# Altium PCB PCB2.PcbDoc
Units mm, origin at the board's own origin, x right, y up, seen from the top; angles counter-clockwise.
Board outline 106 x 106 mm, 2 copper layers (Top Layer, Bottom Layer); 24 components, 36 nets, 168 pads, 5 vias.
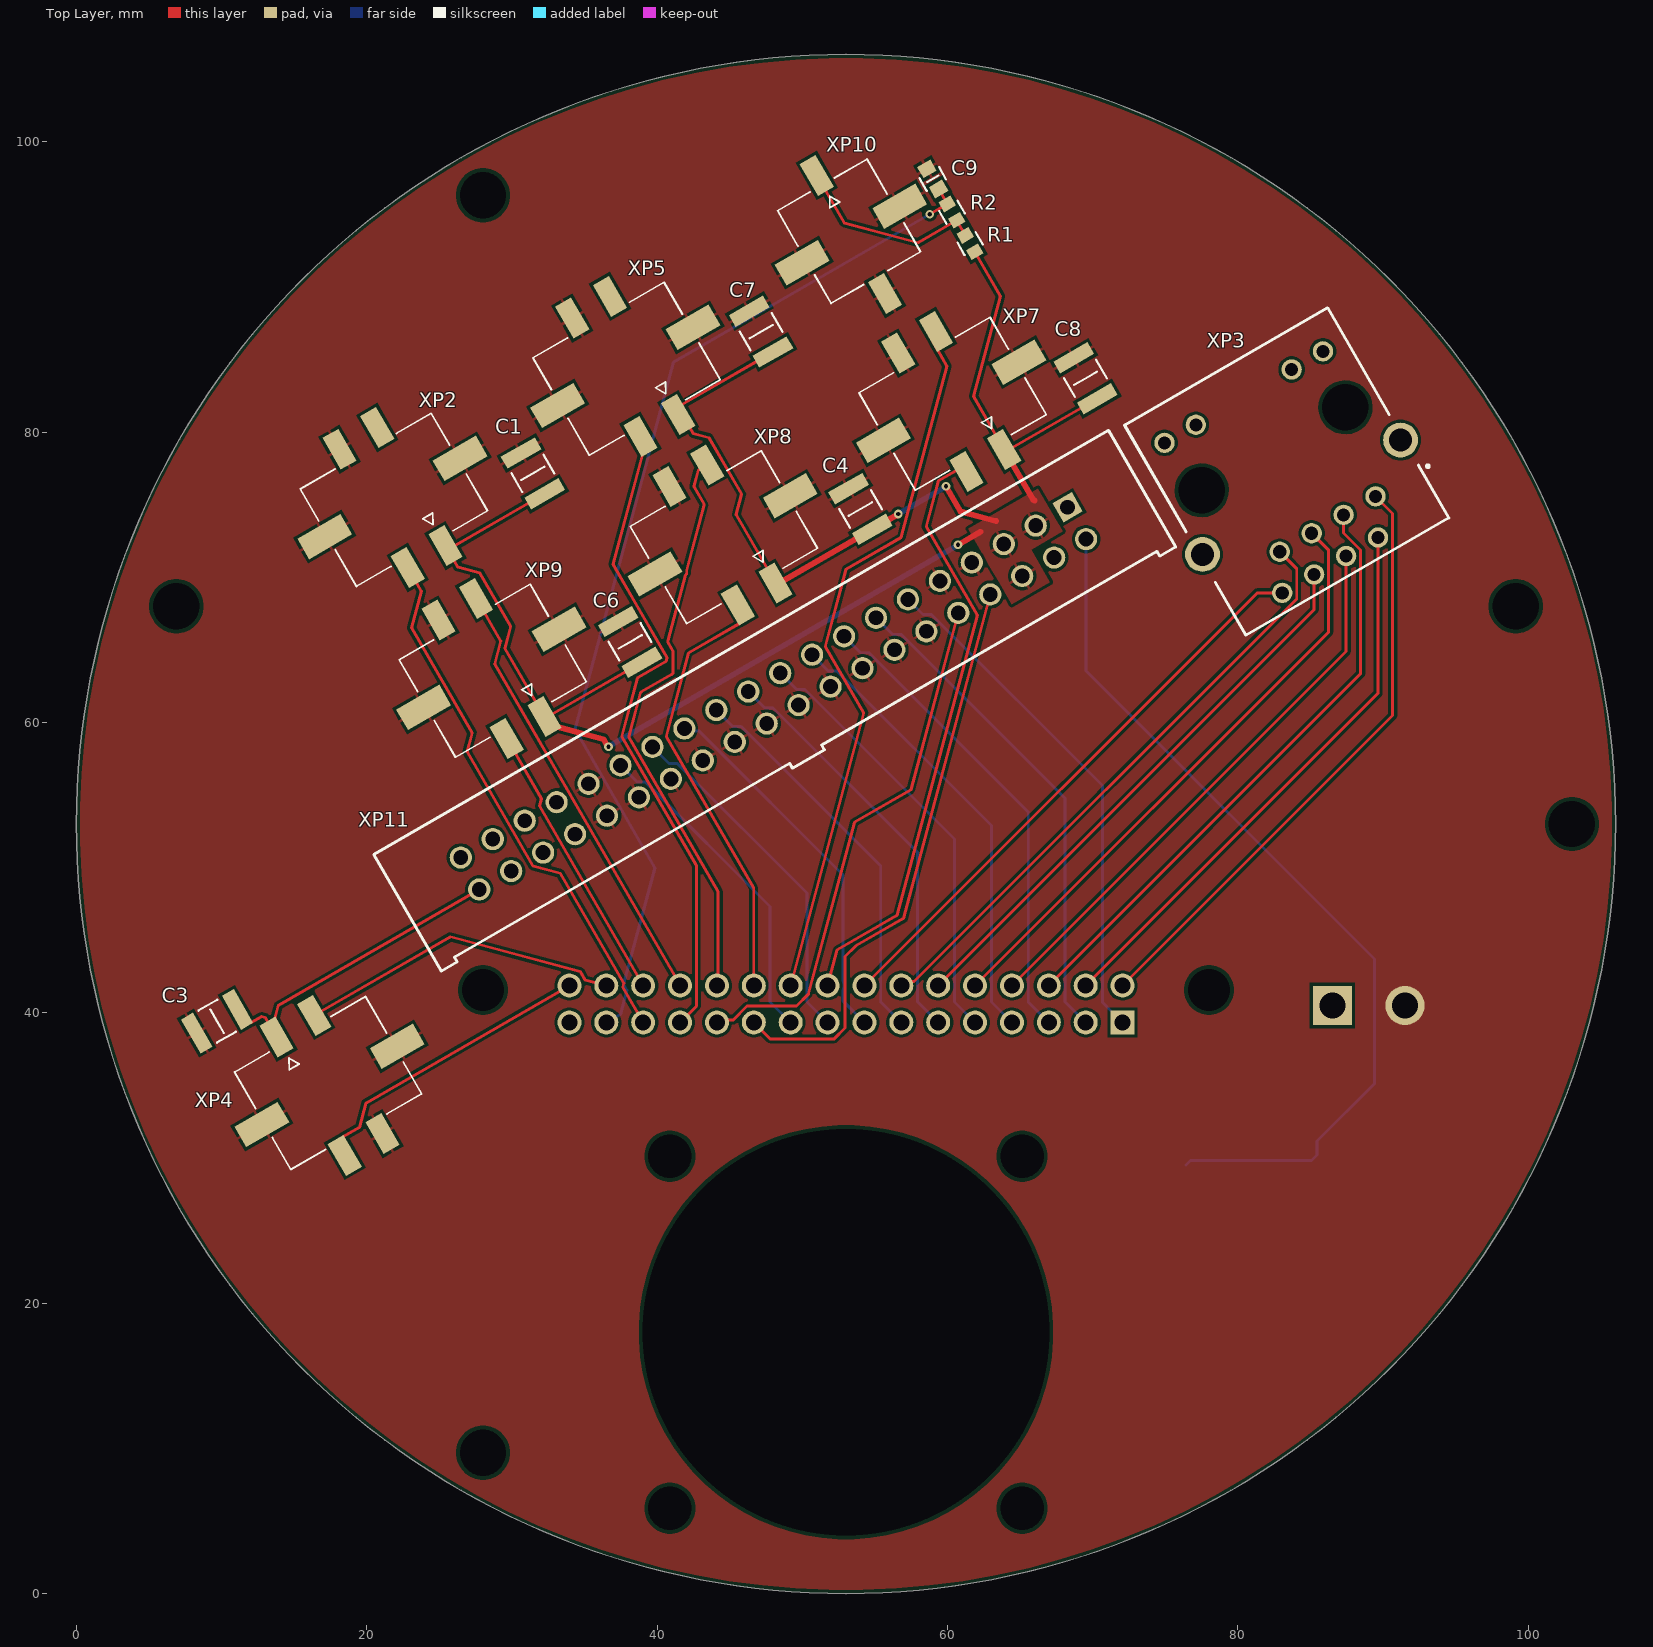
[diagram p0: Top Layer view]
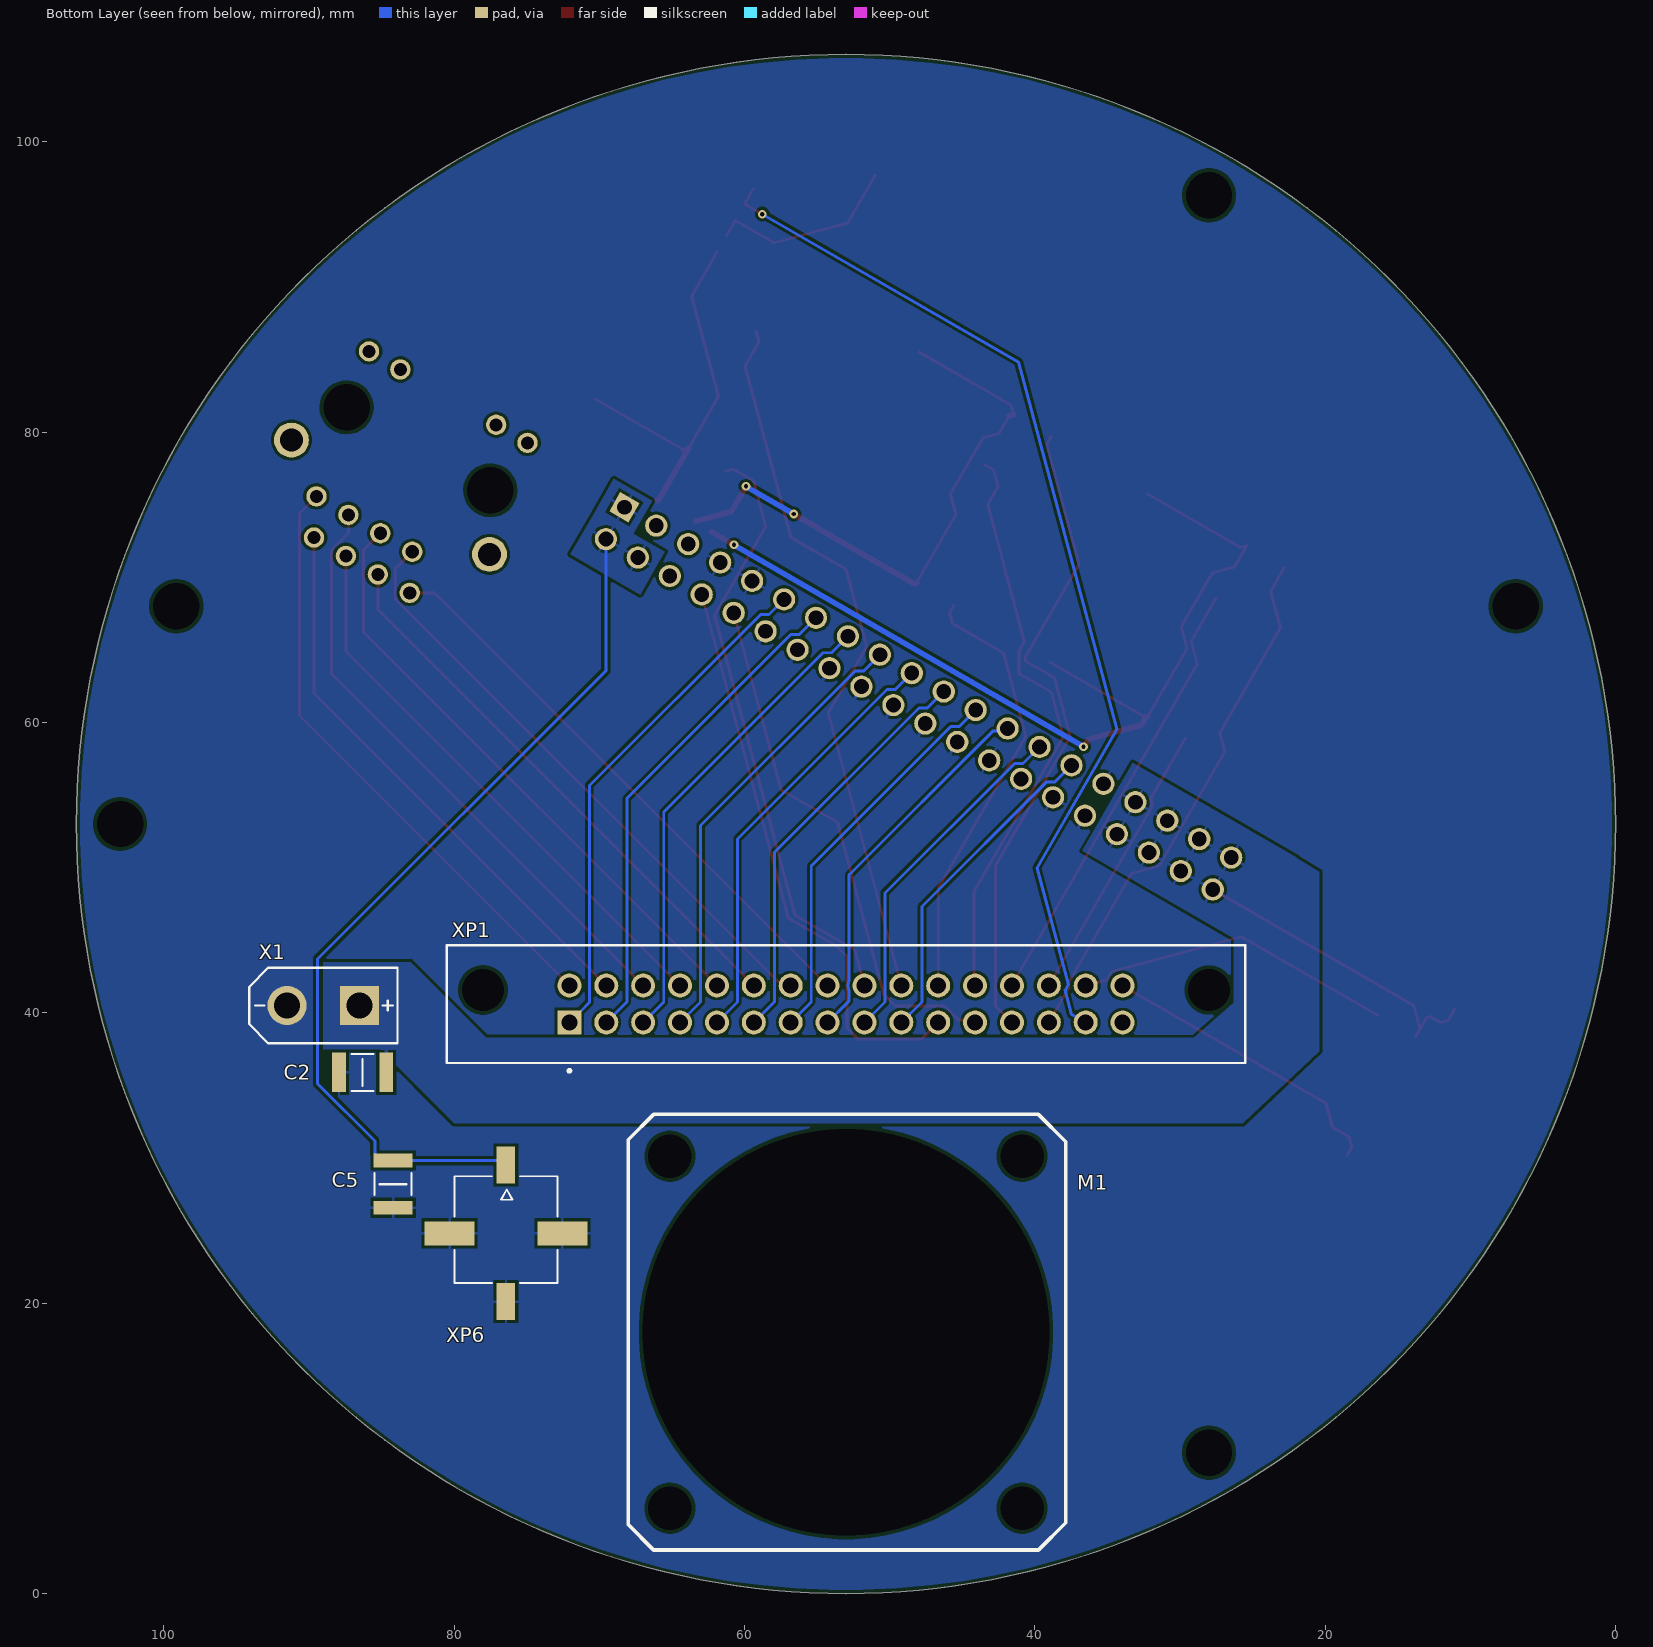
[diagram p1: Bottom Layer view, seen from below]
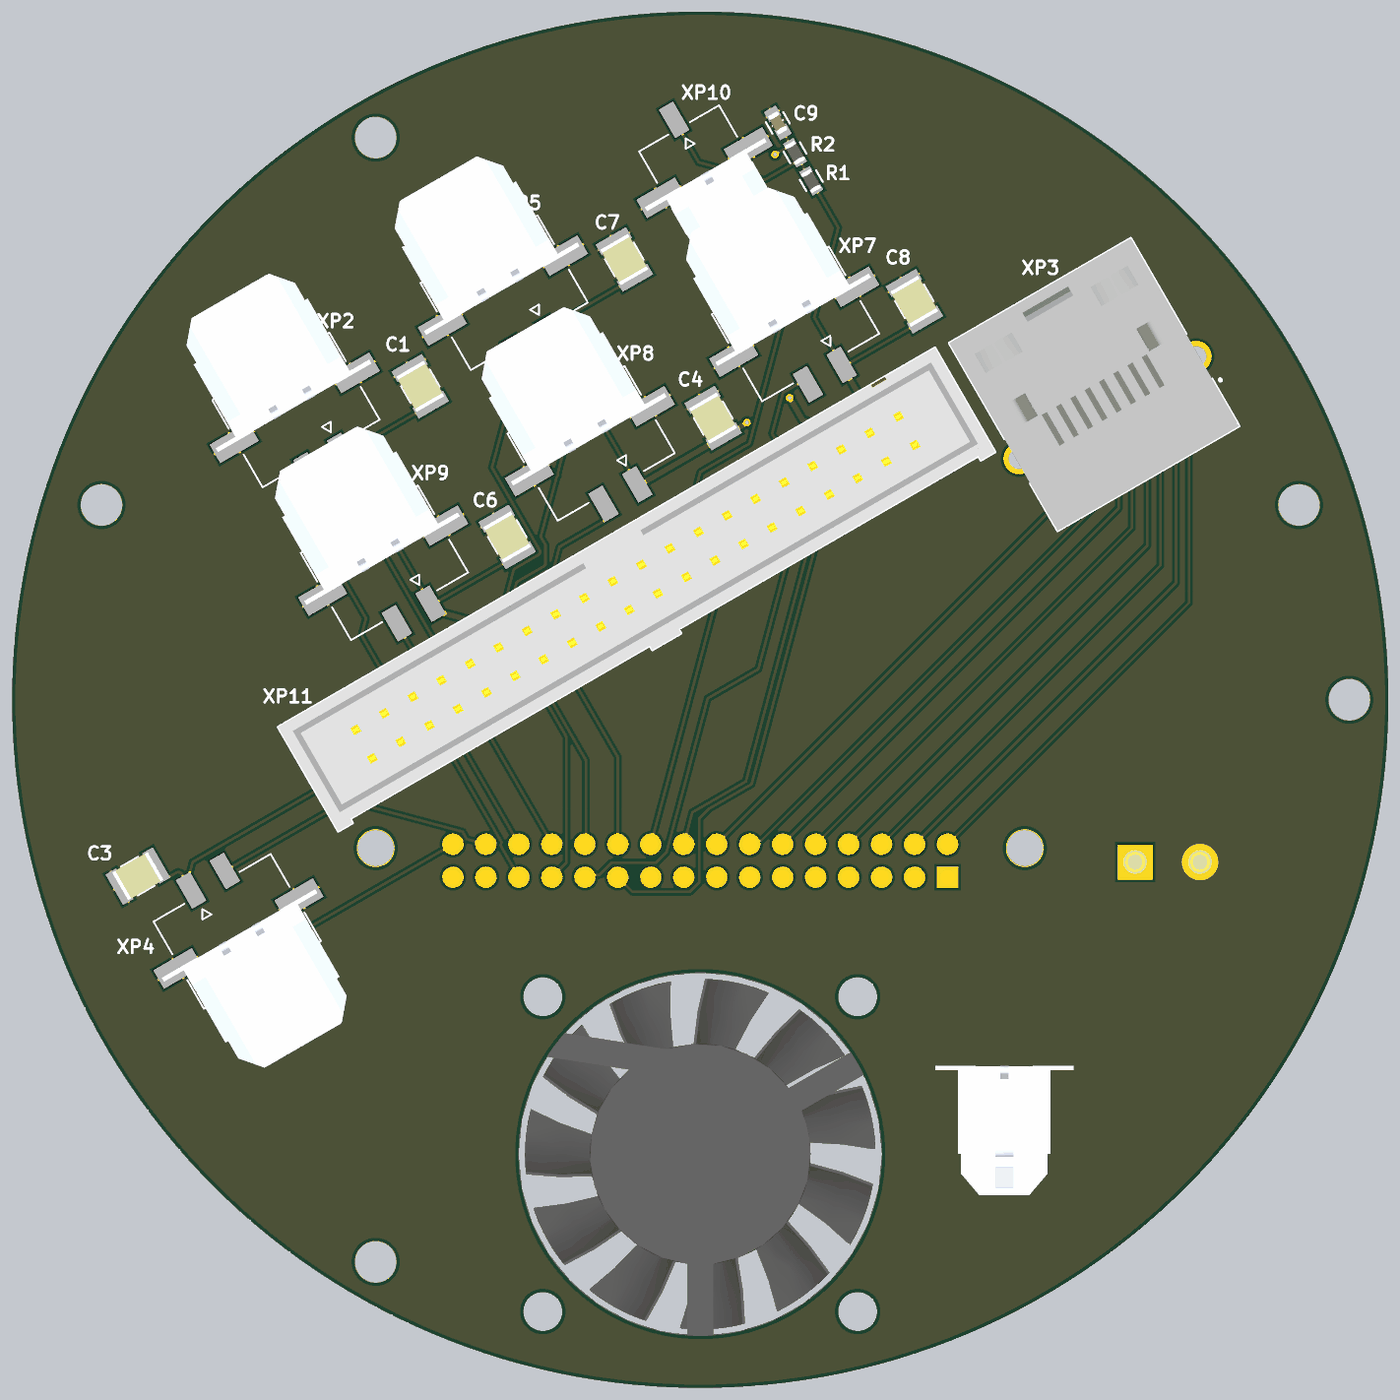
[diagram p2: 3D render of the assembled board from above, using the file's embedded part models]
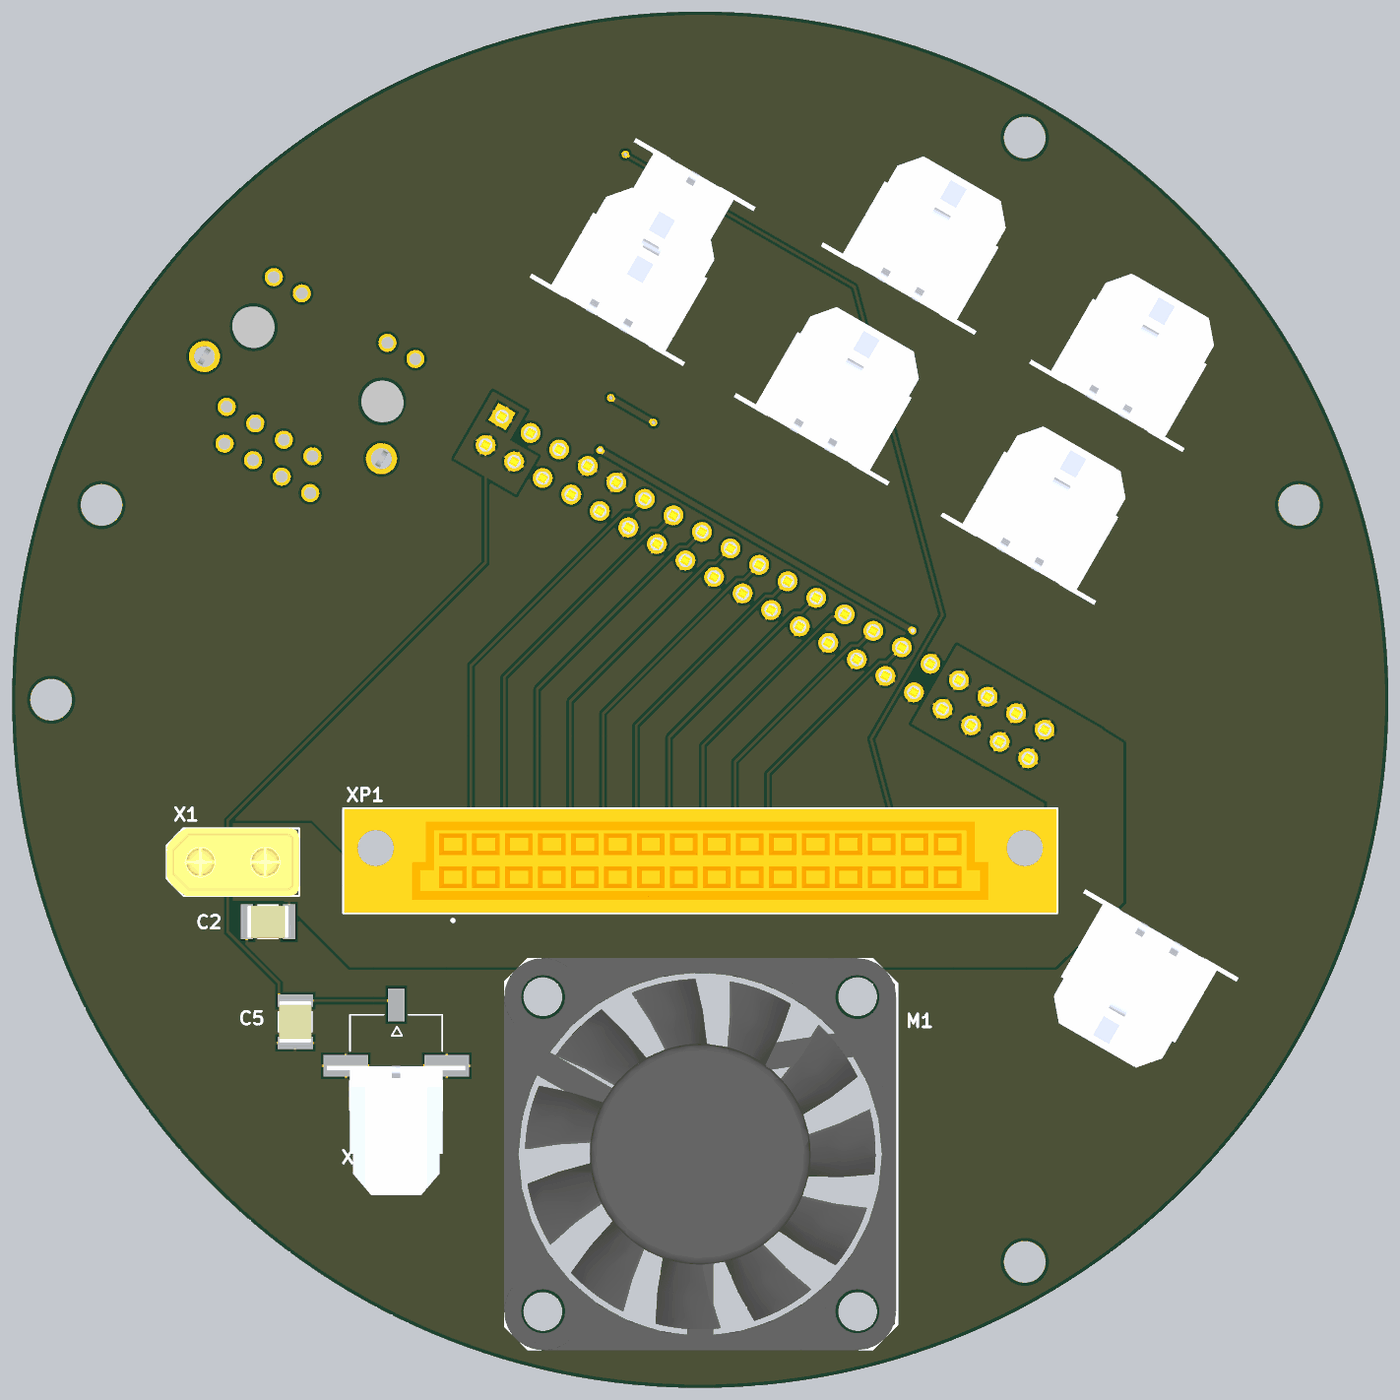
[diagram p3: 3D render of the assembled board from below, using the file's embedded part models]

## Layer stack, top to bottom
Top Solder: solder mask 0.0102, Solder Resist, Dk 3.5
Top Layer: signal copper 0.0356
Dielectric 1: dielectric 0.32, FR-4, Dk 4.8
Bottom Layer: signal copper 0.0356
Bottom Solder: solder mask 0.0102, Solder Resist, Dk 3.5

## Board outline
53.006,0.006 cw(c53.006,53.006) 0.006,53.006 cw(c53.006,53.006) 53.006,106.006 cw(c53.006,53.006) 106.006,53.006 cw(c53.006,53.006)

## Design rules (kind name [scope] priority, off if disabled: settings)
AcuteAngle [All] p1: minimum=3.50000000000000E+0001 checktracksonly=FALSE
BoardOutlineClearance "BoardOutlineClearance 1" [All] p1: gap=0.25 ignorepadtopadclearanceinfootprint=FALSE except(0: Arc-SplitContinuation Track-SplitContinuation SMDPad-SplitContinuation THPad-SplitContinuation Via-SplitContinuation Fill-SplitContinuation Poly-SplitContinuation Region-SplitContinuation Text-SplitContinuation) // Milling
BoardOutlineClearance "BoardOutlineClearance 2" [All] p2: gap=0.4 ignorepadtopadclearanceinfootprint=FALSE except(0: Arc-SplitContinuation Track-SplitContinuation SMDPad-SplitContinuation THPad-SplitContinuation Via-SplitContinuation Fill-SplitContinuation Poly-SplitContinuation Region-SplitContinuation Text-SplitContinuation) // V-Cut
Clearance "Clearance-1 1 Oz" [All] p1: gap=0.2 ignorepadtopadclearanceinfootprint=FALSE except(0.25: Arc-Hole Track-Hole SMDPad-Hole THPad-Hole Via-Hole Fill-Hole Poly-Hole Region-Hole Text-Hole) // Standart
DiffPairsRouting "DiffPairsRouting 1 Oz" [All] p1: maxlimit=0.254 minlimit=0.2 mostfreqgap=0.254 toplayer_minwidth=0.2 toplayer_maxwidth=0.381 toplayer_prefwidth=0.361 bottomlayer_minwidth=0.2 bottomlayer_maxwidth=0.381 bottomlayer_prefwidth=0.361 maxuncoupledlength=12.7
HoleSize "Minimum HoleSize" [IsPad] p1: absolutevalues=TRUE maxlimit=5.9 minlimit=0.6 maxpercent=80.000 minpercent=20.000
HoleSize "Minimum HoleSize VIA 1" [IsVia] p2: absolutevalues=TRUE maxlimit=5.9 minlimit=0.3 maxpercent=80.000 minpercent=20.000 // Standart
HoleToHoleClearance Hole2HoleClearance [All] p1: gap=0.25 allowstackedmicrovias=FALSE
MinimumAnnularRing "Minimum AR VIA Standart" [IsVia] p1: minimumring=0.15
MinimumAnnularRing "Minimum AR PAD Standart" [IsPAD] p2: minimumring=0.2
MinimumSolderMaskSliver "SolderMask Bridge Standart" [All] p1: minsoldermaskwidth=0.15 // All Masks
PlaneClearance "PlaneClearance 1 Oz" [All] p1: clearance=0.2
PlaneConnect "TermalConnect-1 1 Oz" [All] p1: planeconnectstyle=Relief reliefexpansion=0.2 reliefentries=4 reliefconductorwidth=0.2 reliefairgap=0.2 // Standart
PolygonConnect X1 [Component = 'X1'] p1: connectstyle=Direct reliefconductorwidth=0.254 reliefentries=4 polygonreliefangle="90 Angle" airgapwidth=0.254
PolygonConnect "PolygonConnect-1 1 Oz" [All] p2: connectstyle=Relief reliefconductorwidth=0.2 reliefentries=4 polygonreliefangle="90 Angle" airgapwidth=0.2 // Standart
RoutingCorners [All] p1 off: cornerstyle=45-Degree minsetback=2.54 maxsetback=2.54
RoutingVias [All] p1: holewidth=0.3 width=0.6 viastyle="Through Hole" minholewidth=0.2 minwidth=0.4 maxholewidth=5.9 maxwidth=6.4
SilkToSilkClearance Silk2SilkClearance [All] p1 off: silktosilkclearance=0.15
SilkToSolderMaskClearance Silk2SolderMaskClearance [IsPad] p1 off: minsilkscreentomaskgap=0.15 clearancetoexposedcopper=TRUE
SolderMaskExpansion SolderMaskExpansion-1 [All] p1: expansion=0.05 istentingtop=FALSE // Standart
SolderMaskExpansion "SolderMaskExpansion LDI" [All] p2: expansion=0.025 istentingtop=FALSE // Advance
SupplyNets "Schematic Supply Nets_3" [InNet('+5')] p1: voltage=0.000
SupplyNets "Schematic Supply Nets_2" [InNet('+24')] p2: voltage=0.000
SupplyNets "Schematic Supply Nets_1" [InNet('GND')] p3: voltage=0.000
SupplyNets "Schematic Supply Nets" [InNet('+12')] p4: voltage=0.000
UnRoutedNet [All] p1: checkbadconnections=TRUE
Width "Width 1 Oz" [All] p1: maxlimit=10 minlimit=0.15 preferedwidth=0.2 checkconnectedcopper=TRUE
20 further rules are at their usual default settings.

## Classes and differential pairs
differential pair RS485: +RS485_P -RS485_N
differential pair "ethernet 4": +"ethernet 4_P" -"ethernet 4_N"
differential pair "ethernet 3": +"ethernet 3_P" -"ethernet 3_N"
differential pair "ethernet 2": +"ethernet 2_P" -"ethernet 2_N"
differential pair "ethernet 1": +"ethernet 1_P" -"ethernet 1_N"

## Components (designator, comment, footprint, x,y, rotation, side; value= is the part's Value field where it differs from the comment)
C1 "Capacitor" 1210C 31.438,77.151 r300 top value="22 мк"
C2 "Capacitor" 1210C 86.3,35.9 r180 bottom value="22 мк"
C3 "Capacitor" 1210C 9.689,39.421 r30 top value="22 мк"
C4 "Capacitor" 1210C 54,74.7 r300 top value="22 мк"
C5 "Capacitor" 1210C 84.2,28.2 r90 bottom value="22 мк"
C6 "Capacitor" 1210C 38.138,65.546 r300 top value="22 мк"
C7 "Capacitor" 1210C 47.16,86.92 r300 top value="22 мк"
C8 "Capacitor" 1210C 69.5,83.7 r300 top value="22 мк"
C9 "Capacitor" 0603C 58.983,97.442 r300 top value="0,1 мк"
M1 "cooler3030" cooler3030 53.006,18.006 r180 bottom locked
R1 "Resistor" 0603R 61.558,92.982 r120 top value="1,0 к"
R2 "Resistor" 0603R 60.308,95.147 r120 top value="1,0 к"
X1 "XT30UPB-M" XT30UPB-M 89.006,40.506 r0 bottom locked
XP1 "DIN41612_32_2row_straight_mother" DIN41612_32_2row_straight_mother 53.006,40.606 r0 bottom locked
XP2 "430450418" MOLEX_430450418 21.771,75.495 r30 top
XP3 "1734577-3" 1-1734577-3-rj45-8p8c 89.479,75.569 r30 top
XP4 "430450418" MOLEX_430450418 17.436,35.003 r210 top
XP5 "430450418" MOLEX_430450418 37.806,84.522 r30 top
XP6 "430450218" Molex_430450218 76.425,24.811 r0 bottom
XP7 "430450418" MOLEX_430450418 60.251,82.12 r30 top
XP8 "430450418" MOLEX_430450418 44.506,72.917 r30 top
XP9 "430450418" MOLEX_430450418 28.584,63.725 r30 top
XP10 "430450218" Molex_430450218 53.344,93.609 r210 top
XP11 "IDC_40_Male conector" "IDC_40_Male conector" 48.009,61.661 r210 top locked

## Footprints (in the part's own frame and the unit in brackets; to place one, negate y for a bottom-side part, rotate by r counter-clockwise, add the part's x,y. Pads: shape width x height; smd on the part's side, far side on the other; paste and mask are expansions set on the pad)
1-1734577-3-rj45-8p8c [mm]
  round 1.4 hole 0.9: 1(0,0) 2(-1.27,-2.54) 3(-2.54,0) 4(-3.81,-2.54) 5(-5.08,0) 6(-6.35,-2.54) 7(-7.62,0) 8(-8.89,-2.54) 9(-10.745,10.46) 10(-8.255,10.46) 11(-0.635,10.46) 12(1.855,10.46)
  round 2.4 hole 1.6: MH1(3.43,2.5) MH2(-12.32,2.5)
  round 0 hole 3.2 unplated: MH3(1.27,6.35) MH4(-10.16,6.35)
  silkscreen extent -12.52,-3.8 4.25,12.9, body extent -12.52,-3.8 3.63,12.9, height 16.55
0603C [mm] "Chip Resistor, 2-Leads, Body 1,40x0,80mm, IPC Medium Density"
  rect 0.9x1.05 smd: 1(-0.8,0) 2(0.8,0)
  silkscreen extent -0.5,-0.77 0.5,0.78, body extent -0.85,-0.45 0.85,0.45, height 0.9
0603R [mm] "Chip Resistor, 2-Leads, Body 1.60x0.85mm, IPC Medium Density"
  rect 0.8x0.95 smd: 1(-0.65,0) 2(0.65,0)
  silkscreen extent -0.5,-0.73 0.5,0.73, body extent -0.87,-0.47 0.88,0.48, height 0.9
1210C [mm]
  rect 0.954x2.706 smd paste+0: 1(-1.625,0) 2(1.625,0)
  silkscreen extent -0.75,-1.28 0.75,1.27, body extent -2.35,-1.6 2.35,1.6, height 0.25
cooler3030 [mm]
  round 1.4 hole 3 unplated: 0(-12.125,12.125) 0(-12.125,-12.125) 0(12.125,12.125) 0(12.125,-12.125)
  round 0 hole 28 unplated: 0(0,0)
  silkscreen extent -15,-15 15.13,15, body extent -15.1,-15.1 15.1,15.1, height 6.6
DIN41612_32_2row_straight_mother [mm]
  rect 1.65x1.65 / inner round 1.65 / far side rect 1.65x1.65 hole 1.1: A1(19.05,1.27)
  round 1.65 hole 1.1: A2(16.51,1.27) A3(13.97,1.27) A4(11.43,1.27) A5(8.89,1.27) A6(6.35,1.27) A7(3.81,1.27) A8(1.27,1.27) A9(-1.27,1.27) A10(-3.81,1.27) A11(-6.35,1.27) A12(-8.89,1.27) A13(-11.43,1.27) A14(-13.97,1.27) A15(-16.51,1.27) A16(-19.05,1.27) B1(19.05,-1.27) B2(16.51,-1.27) B3(13.97,-1.27) B4(11.43,-1.27) B5(8.89,-1.27) B6(6.35,-1.27) B7(3.81,-1.27) B8(1.27,-1.27) B9(-1.27,-1.27) B10(-3.81,-1.27) B11(-6.35,-1.27) B12(-8.89,-1.27) B13(-11.43,-1.27) B14(-13.97,-1.27) B15(-16.51,-1.27) B16(-19.05,-1.27)
  round 0 hole 2.9 unplated: ""(-25,-0.97) ""(25,-0.97)
  silkscreen extent -27.5,-4.05 27.5,4.7, body extent -27.45,-4 27.45,4, height 11.6
"IDC_40_Male conector" [mm] "Connector; IDC"
  rect 1.53x1.53 / inner round 1.53 / far side rect 1.53x1.53 hole 1.02: 1(-24.13,-1.27)
  round 1.53 hole 1.02: 2(-24.13,1.27) 3(-21.59,-1.27) 4(-21.59,1.27) 5(-19.05,-1.27) 6(-19.05,1.27) 7(-16.51,-1.27) 8(-16.51,1.27) 9(-13.97,-1.27) 10(-13.97,1.27) 11(-11.43,-1.27) 12(-11.43,1.27) 13(-8.89,-1.27) 14(-8.89,1.27) 15(-6.35,-1.27) 16(-6.35,1.27) 17(-3.81,-1.27) 18(-3.81,1.27) 19(-1.27,-1.27) 20(-1.27,1.27) 21(1.27,-1.27) 22(1.27,1.27) 23(3.81,-1.27) 24(3.81,1.27) 25(6.35,-1.27) 26(6.35,1.27) 27(8.89,-1.27) 28(8.89,1.27) 29(11.43,-1.27) 30(11.43,1.27) 31(13.97,-1.27) 32(13.97,1.27) 33(16.51,-1.27) 34(16.51,1.27) 35(19.05,-1.27) 36(19.05,1.27) 37(21.59,-1.27) 38(21.59,1.27) 39(24.13,-1.27) 40(24.13,1.27)
  silkscreen extent -29.21,-4.45 29.21,4.83, body extent -29.21,-4.45 29.21,4.83, height 8.89
Molex_430450218 [mm]
  rect 3.43x1.65 smd mask+0.076: 0(-3.885,0) 0(3.885,0)
  rect 1.27x2.54 smd mask+0.076: 1(0,-4.7) 2(0,4.7)
  silkscreen extent -3.56,-3.94 3.56,3.43, body extent -5.33,-5.6 5.33,5.6, height 9.96
MOLEX_430450418 [mm]
  rect 3.43x1.65 smd mask+0.076: 0(-5.385,0) 0(5.385,0)
  rect 1.27x2.54 smd mask+0.076: 1(1.5,-4.7) 2(-1.5,-4.7) 3(1.5,4.7) 4(-1.5,4.7)
  silkscreen extent -5.21,-4.06 5.21,3.68, body extent -6.82,-5.6 6.83,5.6, height 9.96
XT30UPB-M [mm]
  round 2.7 hole 1.8: N(2.5,0)
  rect 2.7x2.7 hole 1.8: P(-2.5,0)
  silkscreen extent -5.1,-2.6 5.1,2.6, body extent -5.1,-2.6 5.1,2.6, height 10.7

## Part data
C1 C2 C3 C4 C5 C6 C7 C8: library part Capacitor_22u_10_25V_X7R_1210C, "Конденсатор", Capacity (nF)=22000, Dielectric=X7R, Tolerance=0,1, Voltage (V)=25, Part Number=Capacitor_22u_10_25V_X7R_1210C
C9: library part Capacitor_0,1u_10_50V_X7R_0603C, "Конденсатор", Capacity (nF)=100, Dielectric=X7R, Tolerance=0,1, Voltage (V)=50, Part Number=Capacitor_0,1u_10_50V_X7R_0603C
M1: "вентилятор 30*30 с дыркой на плате", Part Number=cooler3030
R1 R2: library part Resistor_1.0k_1_0603, "Резистор номиналом 1,0 кОм и точностью 1%", Tolerance=1%, Part Number=Resistor_1.0k_1_0603
X1: "2-пиновый разъем с ключом", Value1="эта плюс", Value2="это пинус", Part Number=XT30UPB-M, System=Connector
XP1: "DIN41612 (DS1118-32F0V23), Разъем (розетка) тип B 32pin (2х16), шаг 2.54мм двухрядный прямой (ряд АB)", Part Number=DIN41612_32_2row_straight_mother, System=Connector
XP2 XP5: library part Molex_430450418, "Разъем типа провод-плата, 3 мм, 4 контакт(-ов), Штыревой Разъем, для поверностного монтажа", Value1=Питание, Value2=PWM, Value4=Общий, Part Number=Molex_430450418, System=Connector
XP3: library part 1-1734577-3-rj45-8p8c, "Модульный разъем, Cat3, RJ45, Гнездо, 8 контакт(-ов), 8 вывод(-ов), 1 порт(-ов)", Part Number=1-1734577-3-rj45-8p8c, System=Connector
XP4: library part Molex_430450418, "Разъем типа провод-плата, 3 мм, 4 контакт(-ов), Штыревой Разъем, для поверностного монтажа", Value1=Питание, Value2=RS485_P, Value3=RS485_N, Value4=Общий, Part Number=Molex_430450418, System=Connector
XP6: library part Molex_430450218, "Разъем типа провод-плата, 3 мм, 2 контакт(-ов), Штыревой Разъем, Серия Micro-Fit для поверхностного монтажа", Value1="+12 В", Value2=Общий, Value3=Корпус, Part Number=Molex_430450218, Value4=Корпус
XP7: library part Molex_430450418, "Разъем типа провод-плата, 3 мм, 4 контакт(-ов), Штыревой Разъем, для поверностного монтажа", Value1=Питание, Value2=GA_P, Value3=GA_N, Value4=Общий, Part Number=Molex_430450418
XP8 XP9: library part Molex_430450418, "Разъем типа провод-плата, 3 мм, 4 контакт(-ов), Штыревой Разъем, для поверностного монтажа", Value1=Питание, Value2=RX, Value3=TX, Value4=Общий, Part Number=Molex_430450418
XP10: library part Molex_430450218, "Разъем типа провод-плата, 3 мм, 2 контакт(-ов), Штыревой Разъем, Серия Micro-Fit для поверхностного монтажа", Value1=Выключатель, Value2=Общий, Value3=Корпус, Part Number=Molex_430450218, Value4=Корпус
XP11: "IDC 40-пиновый разъём прямая вилка", Part Number="IDC_40_Male conector", System=Connector

## Free pads (board coordinates)
  rect 0x0 hole 3.2 mask+0: 2(6.884,68.006) 2(28.006,9.705) 2(28.006,96.308) 2(99.128,68.006) 2(103.006,53.006)

## Via types
v1: diameter 0.6, hole 0.3, Top Layer to Bottom Layer, 5 vias

## Nets (pads, with @x,y where several pads share a name; then routed paths per layer and width w, separated by ;. In a path a pad name is that pad's centre, name@x,y a point inside that pad or via, vN(x,y) a via of type N, cw(c..) or ccw(c..) an arc to the next point about the centre after c; other vN are vias at no path point)
+5: C1.2 C4.2 C6.2 C7.2 C8.2 R1.1 XP2.1 XP5.1 XP7.1 XP8.1 XP9.1 XP11.3 XP11.5 XP11.6 | length 131.5
  Top Layer w0.2: XP9.1 29.515,65.112 29.918,66.615 27.794,70.294 26.27,70.703 XP2.1 25.864,72.056 C1.2 ; XP9.1@32.404,60.359 C6.2 ; XP5.1 41.629,81.851 C7.2 ; XP5.1@41.776,81.116 42.477,79.903 43.569,79.61 45.816,75.718 45.437,74.304 XP8.1 ; R1.1 63.641,89.375 61.788,82.459 XP7.1@63.85,78.887 ; XP7.1@64.148,78.734 C8.2
  Top Layer w0.4: XP9.1 XP9.1@32.349,60.373 ; XP9.1@32.404,60.359 XP9.1@32.349,60.373 ; v1(36.645,58.333) 36.592,58.347 36.302,58.849 32.666,59.823 XP9.1@32.349,60.373 ; XP5.1 XP5.1@41.776,81.116 ; XP8.1 48.33,69.55 C4.2 54.818,73.312 56.6,74.341 v1(56.605,74.36) ; v1(59.896,76.26) 60.896,74.528 63.355,73.869 ; v1(60.72,72.233) 62.279,73.133 ; XP7.1@63.85,78.887 XP7.1@64.148,78.734 ; XP7.1@63.9,78.8 65.917,75.306 66.003,75.283
  Bottom Layer w0.4: v1(36.645,58.333) v1(60.72,72.233) ; v1(56.605,74.36) v1(59.896,76.26)
+12: C5.2 XP6.1 XP11.1 XP11.2 XP11.4 | length 61.6
  Bottom Layer w0.2: XP11.2 69.541,63.559 89.4,43.7 89.4,35.121 85.453,31.174 85.453,30.202 85.076,29.825 C5.2 76.739,29.825 XP6.1
+24: C2.2 C3.2 X1.P XP4.1 XP11.33 XP11.34 XP11.35 XP11.36 XP11.37 XP11.38 XP11.39 XP11.40 | length 21.7
  Top Layer w0.2: C3.2 11.534,39.475 12.05,39.337 12.76,39.748 13.002,39.683 XP4.1 ; XP4.1@13.47,38.873 13.907,40.506 XP11.40
DCDC_EN: C9.2 R2.2 XP1.A15 | length 71.8
  Top Layer w0.2: v1(58.771,95.01) R2.2 C9.2
  Bottom Layer w0.2: XP1.A15 37.471,39.899 37.917,41.565 37.693,41.953 39.846,49.989 34.35,59.509 41.135,84.827 v1(58.771,95.01)
DSHOT1: XP1.A1 XP11.11 | length 35.6
  Bottom Layer w0.2: XP11.11 58.307,67.442 58.884,67.442 70.672,55.653 70.672,40.728 71.231,40.169 71.333,40.061 XP1.A1
DSHOT2: XP1.A2 XP11.13 | length 34.2
  Bottom Layer w0.2: XP11.13 56.208,66.071 56.784,66.071 68.101,54.754 68.101,40.751 XP1.A2
DSHOT3: XP1.A3 XP11.15 | length 32.8
  Bottom Layer w0.2: XP11.15 54.008,64.801 54.585,64.801 65.561,53.824 65.561,40.751 XP1.A3
DSHOT4: XP1.A4 XP11.17 | length 31.4
  Bottom Layer w0.2: XP11.17 51.808,63.531 52.385,63.531 63.021,52.895 63.021,40.751 XP1.A4
DSHOT5: XP1.A5 XP11.19 | length 30
  Bottom Layer w0.2: XP11.19 49.609,62.261 50.185,62.261 60.481,51.965 60.481,40.751 XP1.A5
DSHOT6: XP1.A6 XP11.21 | length 28.5
  Bottom Layer w0.2: XP11.21 47.409,60.991 47.986,60.991 57.941,51.035 57.941,40.751 XP1.A6
DSHOT7: XP1.A7 XP11.23 | length 27.1
  Bottom Layer w0.2: XP11.23 45.209,59.721 45.786,59.721 55.401,50.106 55.401,40.751 XP1.A7
DSHOT8: XP1.A8 XP11.25 | length 25.9
  Bottom Layer w0.2: XP11.25 42.061,59.4 42.9,59.4 52.738,49.563 52.756,49.544 52.796,49.475 52.796,42.254 cw(c51.736,41.876) 52.804,41.523 52.803,41.518 52.796,41.492 52.796,40.846 52.836,40.777 52.855,40.758 XP1.A8
DSHOT9: XP1.A9 XP11.27 | length 24.3
  Bottom Layer w0.2: XP11.27 40.81,57.181 41.386,57.181 50.321,48.246 50.321,40.751 XP1.A9
DSHOT10: XP1.A10 XP11.29 | length 22.9
  Bottom Layer w0.2: XP11.29 38.61,55.911 39.187,55.911 47.781,47.316 47.781,40.751 XP1.A10
"ethernet 1_N": XP1.B2 XP3.2 | length 39.2
  Top Layer w0.2: XP1.B2 89.649,62.009 XP3.2
"ethernet 1_P": XP1.B1 XP3.1 | length 41.9
  Top Layer w0.2: XP1.B1 90.649,60.469 90.649,74.399 XP3.1
"ethernet 2_N": XP1.B6 XP3.6 | length 39
  Top Layer w0.2: XP1.B6 85.25,67.77 XP3.6
"ethernet 2_P": XP1.B3 XP3.3 | length 41.8
  Top Layer w0.2: XP1.B3 88.45,63.35 88.45,71.878 87.28,73.048 XP3.3
"ethernet 3_N": XP1.B5 XP3.5 | length 41.7
  Top Layer w0.2: XP1.B5 86.25,66.23 86.25,71.859 XP3.5
"ethernet 3_P": XP1.B4 XP3.4 | length 39.1
  Top Layer w0.2: XP1.B4 87.45,64.89 XP3.4
"ethernet 4_N": XP1.B8 XP3.8 | length 40
  Top Layer w0.2: XP1.B8 81.324,68.924 XP3.8
"ethernet 4_P": XP1.B7 XP3.7 | length 42
  Top Layer w0.2: XP1.B7 57.094,42.154 57.694,42.154 84.05,68.51 84.05,70.589 XP3.7
GA_N: XP1.B10 XP7.3 | length 49.5
  Top Layer w0.2: XP1.B10 54.225,60.644 51.581,65.225 53.008,70.551 56.791,72.736 59.958,84.557 59.004,86.209 XP7.3
GA_P: XP1.B9 XP7.2 | length 41.2
  Top Layer w0.2: XP1.B9 52.394,44.332 56.517,46.712 62.059,67.395 58.535,73.499 59.381,76.656 60.751,77.447 XP7.2
GND: C1.1 C2.1 C3.1 C4.1 C5.1 C6.1 C7.1 C8.1 C9.1 X1.N XP2.0 XP2.4 XP4.0 XP4.4 XP5.0 XP5.4 XP6.0 XP6.2 XP7.0 XP7.4 XP8.0 XP8.4 XP9.0 XP9.4 XP10.0 XP10.2 XP11.7 XP11.9 XP11.12 XP11.14 XP11.16 XP11.18 XP11.20 XP11.22 XP11.24 XP11.26 XP11.28 XP11.30 XP11.31 XP11.32
NetR1_2: R1.2 R2.1 XP10.1 | length 13.3
  Top Layer w0.2: XP10.1 52.884,94.406 57.966,93.044 R2.1 60.783,94.324 61.083,93.804 R1.2
"PWM 1": XP1.A12 XP11.10 | length 36.5
  Top Layer w0.2: XP1.A12 44.292,39.512 45.241,39.512 46.19,40.461 49.594,40.461 50.412,41.279 53.583,53.114 57.478,55.363 XP11.10
"PWM 2": XP1.A11 XP11.8 | length 39.9
  Top Layer w0.2: XP1.A11 47.781,38.211 52.202,38.211 52.944,38.953 52.944,43.874 53.686,44.616 56.965,46.509 XP11.8
"PWM 3": XP1.A13 XP5.2 | length 44.9
  Top Layer w0.2: XP5.2 39.174,79.152 36.961,70.891 38.493,68.237 39.693,66.159 40.683,64.444 40.619,64.204 38.645,63.065 37.566,59.039 42.673,50.193 42.7,50.147 42.7,41.932 cw(c41.576,41.876) 42.7,41.821 42.7,40.46 XP1.A13
"PWM 4": XP1.A14 XP2.2 | length 37.1
  Top Layer w0.2: XP2.2 23.765,69.042 23.086,66.508 27.261,59.276 26.912,57.973 31.445,50.122 33.326,49.617 37.704,42.035 37.632,41.769 XP1.A14
RS485_N: XP1.B16 XP4.3 | length 20.6
  Top Layer w0.2: XP4.3 18.17,30.732 18.365,31.463 19.496,32.116 19.944,33.786 XP1.B16
RS485_P: XP1.B15 XP4.2 | length 22.3
  Top Layer w0.2: XP4.2 25.762,45.237 34.698,42.842 35.028,42.27 XP1.B15
UART2_RX: XP1.B11 XP8.2 | length 30.2
  Top Layer w0.2: XP8.2 45.874,67.547 45.678,66.816 42.167,64.789 40.626,59.038 46.65,48.602 46.65,41.882 XP1.B11
UART2_TX: XP1.B12 XP8.3 | length 40.1
  Top Layer w0.2: XP8.3 42.991,77.47 42.884,77.408 42.827,77.352 42.544,76.295 42.544,76.215 43.231,75.026 43.231,74.946 42.039,70.497 42.039,70.47 42.039,70.45 42.04,70.448 42.04,70.244 41.946,70.149 40.738,65.644 40.732,65.618 40.732,65.538 41.083,64.929 41.083,64.876 41.083,63.39 41.006,63.312 38.908,62.101 38.852,62.045 38.838,61.993 38.055,59.072 38.055,58.992 44.173,48.395 44.2,48.349 XP1.B12@44.2,41.645
UART3_RX: XP1.B14 XP9.2 | length 19.6
  Top Layer w0.2: XP9.2 32.037,54.743 31.901,54.235 XP1.B14
UART3_TX: XP1.B13 XP9.3 | length 30.6
  Top Layer w0.2: XP9.3 29.232,65.601 28.81,64.025 41.583,41.901 XP1.B13
pads on no net: M1.0 XP1. XP1.A16 XP2.3 XP3.9 XP3.10 XP3.11 XP3.12 XP3.MH1 XP3.MH2 XP3.MH3 XP3.MH4 XP5.3

## Polygon pours and split planes (outlines as drawn)
GND on Top Layer "GND_L01_P009" (solid, pour order 9): 53.006,0.006 cw(c53.006,53.006) 0.006,53.006 cw(c53.006,53.006) 53.006,106.006 cw(c53.006,53.006) 106.006,53.006 cw(c53.006,53.006)
+5 on Top Layer "+5_L01_P000" (solid, pour order 0): 67.053,69.653 65.753,71.905 67.923,73.158 67.682,73.574 67.523,73.851 66.223,76.102 61.427,73.333 62.886,70.805 64.427,68.137
GND on Bottom Layer "GND_L02_P010" (solid, pour order 10): 53.006,0.006 cw(c53.006,53.006) 0.006,53.006 cw(c53.006,53.006) 53.006,106.006 cw(c53.006,53.006) 106.006,53.006 cw(c53.006,53.006)
+12 on Bottom Layer "+12_L02_P006" (solid, pour order 6): 66.361,75.258 67.661,73.007 65.491,71.754 65.731,71.338 65.891,71.061 67.191,68.809 71.987,71.578 70.527,74.107 68.987,76.775
+24 on Bottom Layer "+24_L02_P005" (solid, pour order 5): 22.502,50.997 26.3,45.235 26.3,40.687 29.041,38.3 77.8,38.3 83,43.5 89,43.5 89,37.5 85.1,37.5 80,32.4 25.651,32.4 20.4,37.382 20.4,49.695
+24 on Bottom Layer "+24_L02_P001" (solid, pour order 1): 33.243,57.226 36.743,51.163 25.484,44.663 21.984,50.726

## Silkscreen, mask and mechanical layers (free items; w line width, h text height)
Mechanical 1:
  circle w0.013: c72.056,41.876 r0.3
  circle w0.013: c53.006,53.006 r53
  circle w0.013: c53.006,18.006 r14
  circle w0.013: c28.006,96.308 r1.5
  circle w0.013: c28.006,9.705 r1.5
  circle w0.013: c103.006,53.006 r1.5
  circle w0.013: c65.131,5.881 r1.5
  circle w0.013: c65.131,30.131 r1.5
  circle w0.013: c40.881,30.131 r1.5
  circle w0.013: c40.881,5.881 r1.5
  circle w0.013: c99.128,68.006 r1.5
  circle w0.013: c6.884,68.006 r1.5
  circle w0.013: c72.056,39.336 r0.3
  circle w0.013: c33.956,41.876 r0.3
  circle w0.013: c33.956,39.336 r0.3